# EAGLE board PolyPad Prototype (EAGLE 9.7.0)

Size 99.39 x 143.52 mm. Coordinates in mm from the lower left corner, seen from the top.
Outline: 0,0 99.39,0 99.39,143.52 0,143.52 0,0
Copper layers (1*16): Top 0.035mm / dielectric 1.5mm / Bottom 0.035mm
Design rules "default": minimum track width 6mil, minimum drill 0.35mm, track to track 6mil, track to pad 6mil, pad to pad 6mil, via to via 6mil, smd to smd 6mil, copper to edge 40mil, drill to drill 6mil, minimum pad ring 10mil, minimum via ring 8mil, stop-mask expansion 4mil, vias tented up to drill 0mil, thermal gap 10mil

## Footprints (pad centres in the part's own frame; a part is rotated, then mirrored left to right if it is on the bottom)
DIODE-AXIAL = drill 1: 1 -5.08,0; 2 5.08,0
1X02 = drill 1.016 long: 1 -1.27,0; 2 1.27,0
RESAD1016W63L850D250B = drill 0.83 pad 1.43: 1 -5.08,0; 2 5.08,0
ARDUINO-UNO-R3-SHIELD = drill 1.016 pad 1.88: 3.3V 24.13,-2.54; 5V 24.13,0; A0 24.13,12.7; A1 24.13,15.24; A2 24.13,17.78; A3 24.13,20.32; A4 24.13,22.86; A5 24.13,25.4; AREF -24.13,-13.97; D2 -24.13,20.32; D3 -24.13,17.78; D4 -24.13,15.24; D5 -24.13,12.7; D6 -24.13,10.16; D7 -24.13,7.62; D8 -24.13,3.81; D9 -24.13,1.27; D10 -24.13,-1.27; D11 -24.13,-3.81; D12 -24.13,-6.35; D13 -24.13,-8.89; GND@0 24.13,2.54; GND@1 24.13,5.08; GND@2 -24.13,-11.43; IOREF 24.13,-7.62; NC 24.13,-10.16; RES 24.13,-5.08; RX -24.13,25.4; SCL -24.13,-19.05; SDA -24.13,-16.51; TX -24.13,22.86; VIN 24.13,7.62

## Placement (x,y rotation side)
D1  DIODEDIODE-AXIAL  [DIODE-AXIAL]  21.21,94.61 0 top
D2  DIODEDIODE-AXIAL  [DIODE-AXIAL]  36.45,94.61 0 top
D3  DIODEDIODE-AXIAL  [DIODE-AXIAL]  51.7,94.61 0 top
D4  DIODEDIODE-AXIAL  [DIODE-AXIAL]  66.94,94.61 0 top
R1  FORCE-SENSOR  [1X02]  16.98,136.64 0 top
R2  FORCE-SENSOR  [1X02]  39.82,136.49 0 top
R3  FORCE-SENSOR  [1X02]  64.33,137.25 0 top
R4  FORCE-SENSOR  [1X02]  93.68,136.8 0 top
R5  100000  [RESAD1016W63L850D250B]  72.02,84.45 90 top
R6  100k  [RESAD1016W63L850D250B]  61.85,84.45 90 top
R7  100k  [RESAD1016W63L850D250B]  56.77,84.45 90 top
R8  100k  [RESAD1016W63L850D250B]  46.62,84.45 90 top
R9  100k  [RESAD1016W63L850D250B]  41.53,84.45 90 top
R10  100k  [RESAD1016W63L850D250B]  31.38,84.45 90 top
R11  100k  [RESAD1016W63L850D250B]  26.3,84.45 90 top
R12  10k  [RESAD1016W63L850D250B]  16.14,84.45 90 top
U1  ARDUINO-UNO-R3-SHIELD  [ARDUINO-UNO-R3-SHIELD]  47.88,29.84 270 top

## Library data of the parts
D1-D4 R1-R12 U1 = Tinkercad

## Nets
R1_1: D1.1 R1.1 R12.2
R2_1: D2.1 R2.1 R10.2
R3_1: D3.1 R3.1 R8.2
R4_1: D4.1 R4.1 R6.2
U1_A0: D1.2 R11.2 U1.A0
U1_A1: D2.2 R9.2 U1.A1
U1_A2: D3.2 R7.2 U1.A2
U1_A3: D4.2 R5.2 U1.A3
U1_GND: R1.2 R2.2 R3.2 R4.2 R5.1 R6.1 R7.1 R8.1 R9.1 R10.1 R11.1 R12.1 U1.GND@0 U1.GND@1 U1.GND@2

## Tracks (layer width: path | path; a pad name or v marks a point on that pad's centre or on a via)
R1_1  (2 unrouted)
R2_1  (2 unrouted)
R3_1  (2 unrouted)
R4_1  (2 unrouted)
U1_A0  (2 unrouted)
U1_A1  (2 unrouted)
U1_A2  (2 unrouted)
U1_A3  (2 unrouted)
U1_GND  (14 unrouted)